# Altium PCB Oxy_PCB.PcbDoc
Units mil, origin at the board's own origin, x right, y up, seen from the top; angles counter-clockwise.
Board outline 2060 x 1575 mil, 2 copper layers (Top Layer, Bottom Layer); 84 components, 71 nets, 338 pads, 82 vias.
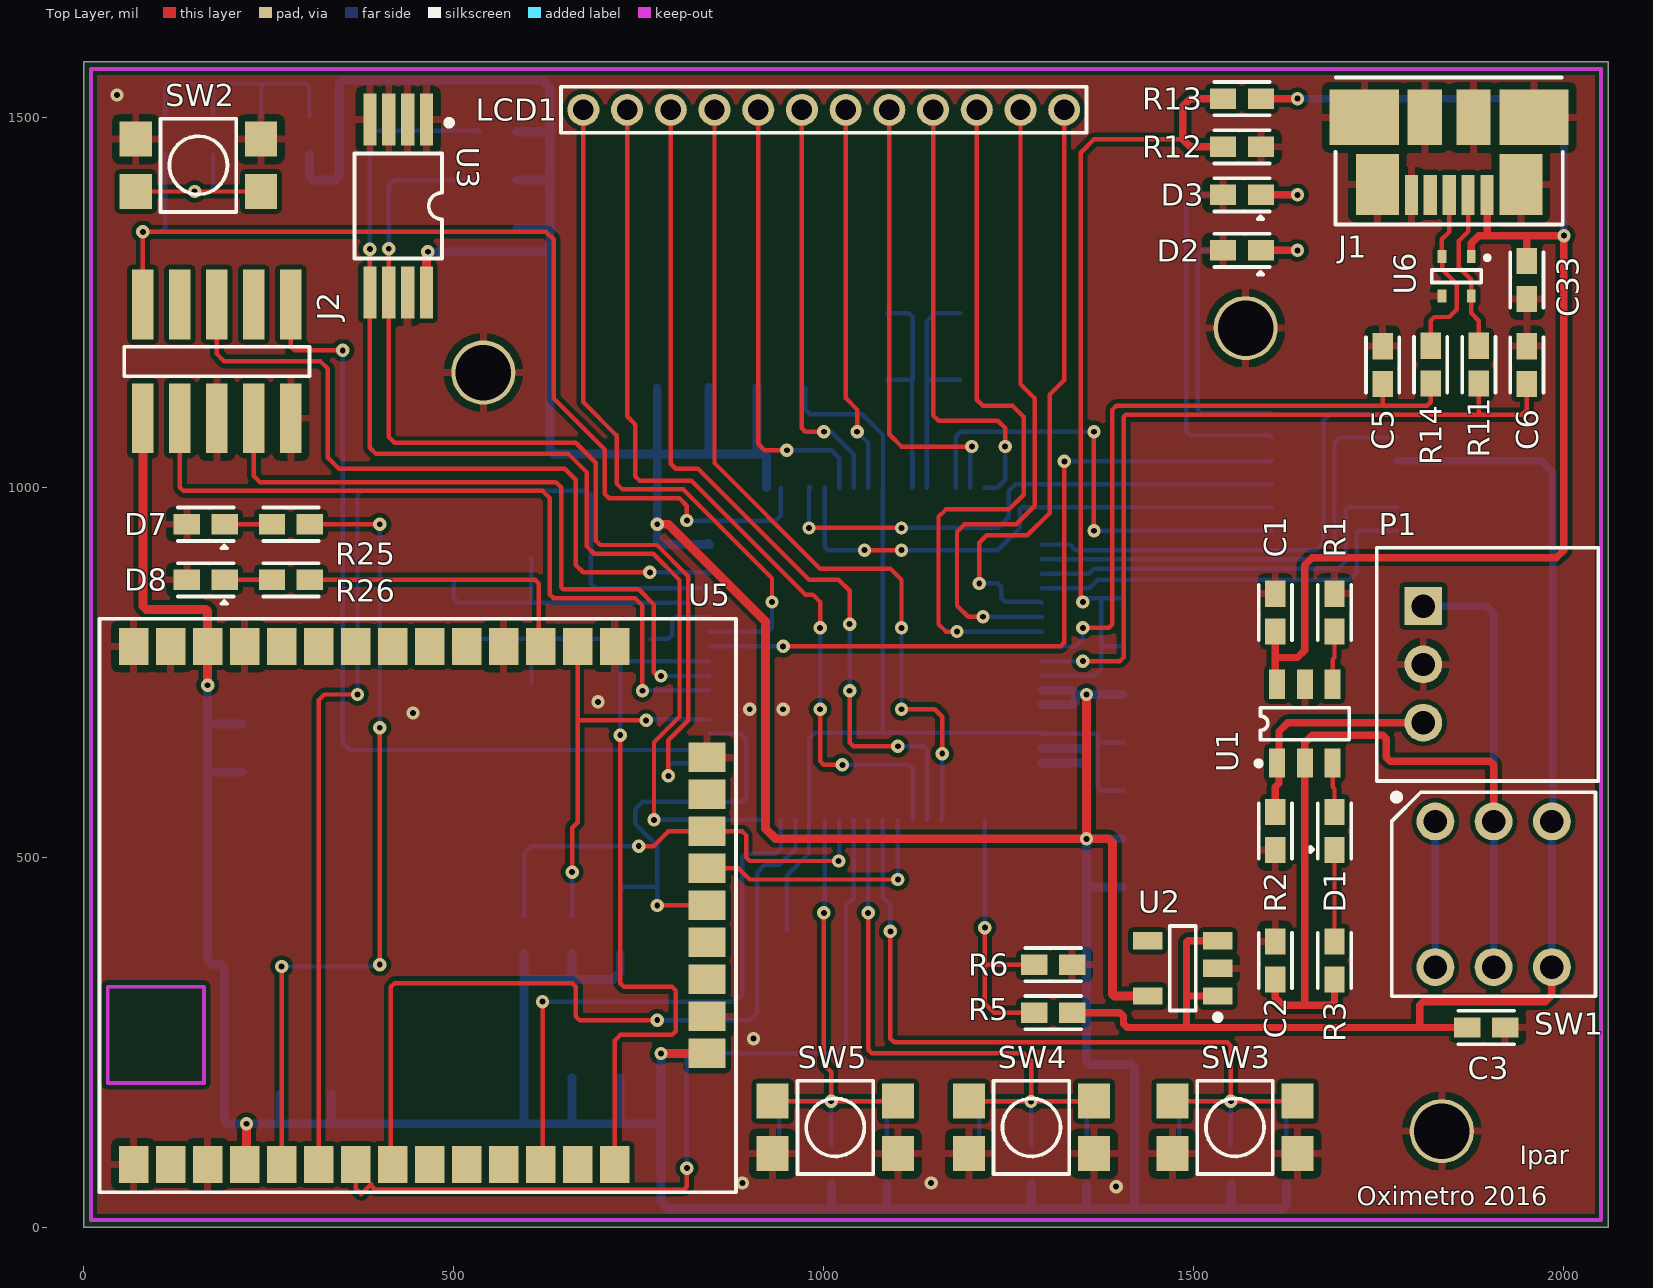
[diagram p0: Top Layer view]
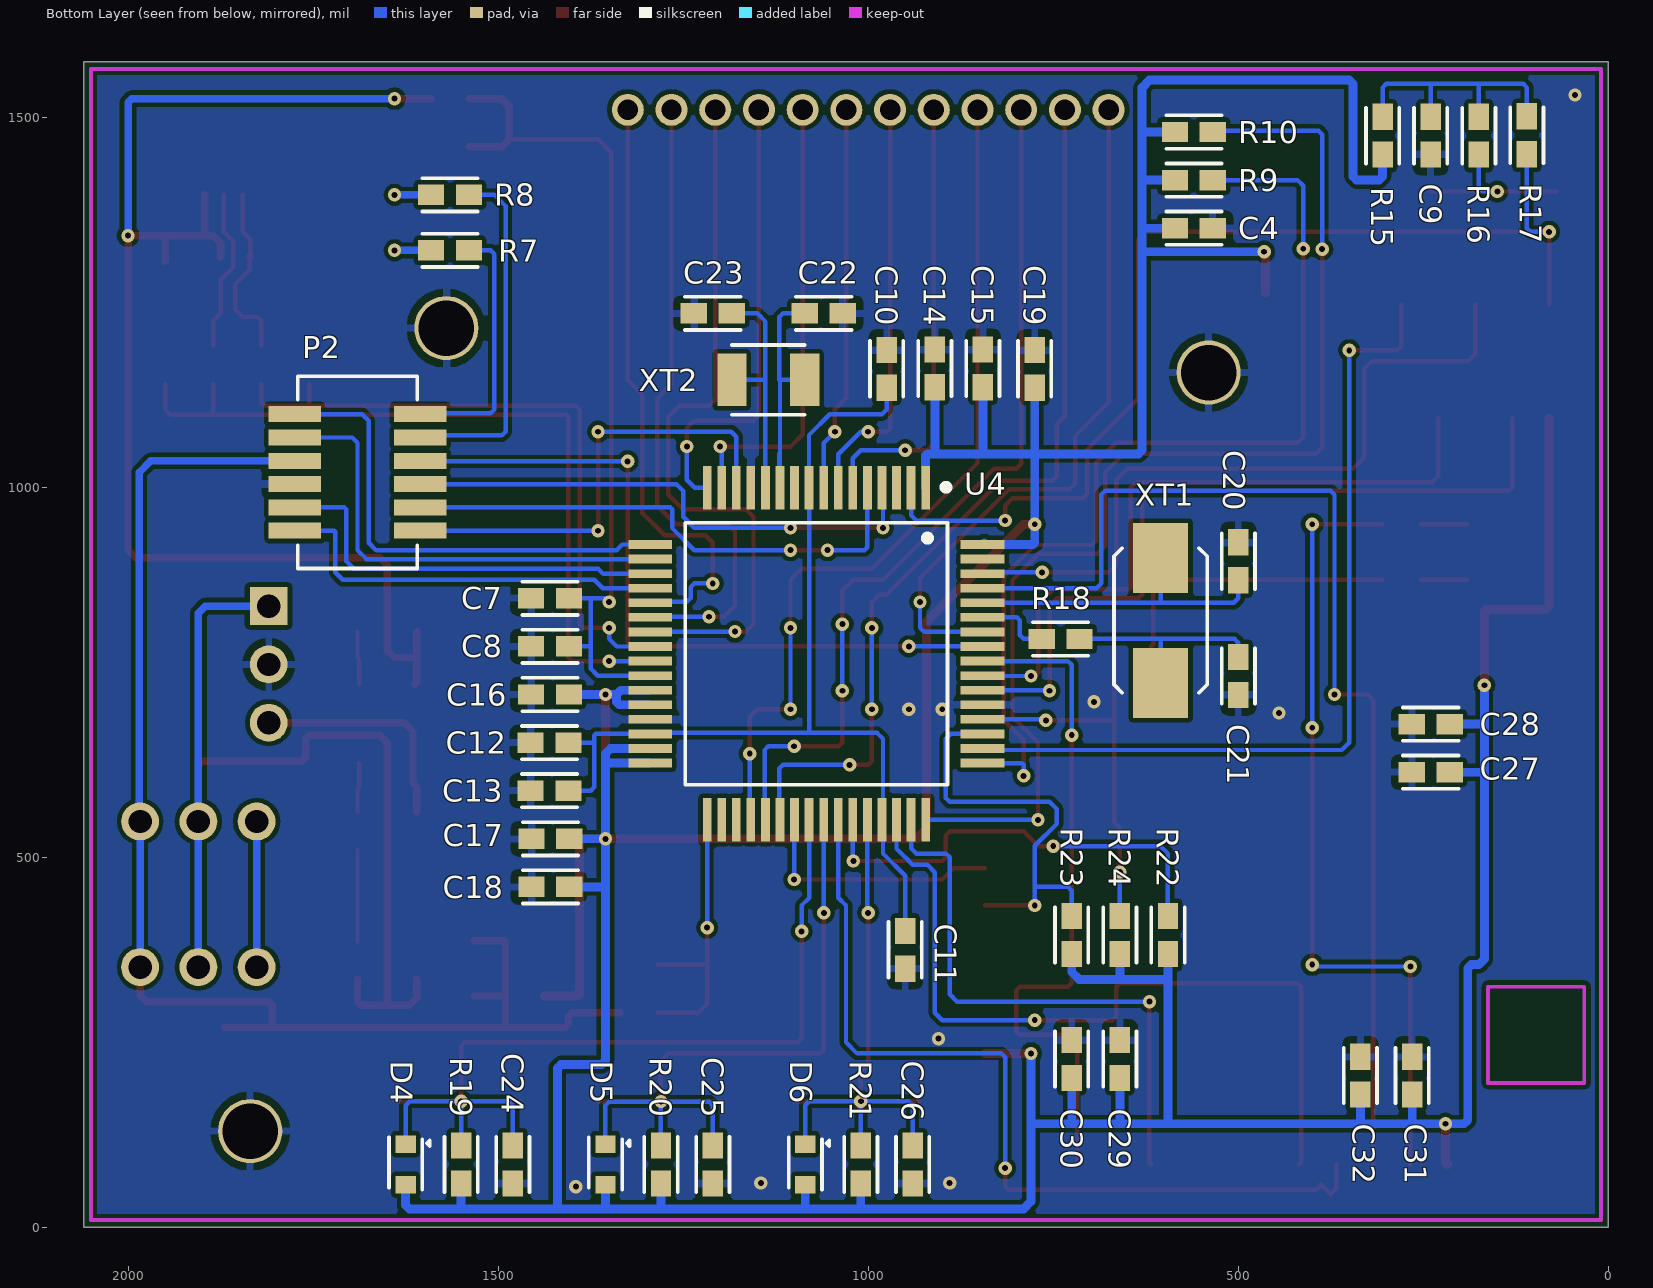
[diagram p1: Bottom Layer view, seen from below]
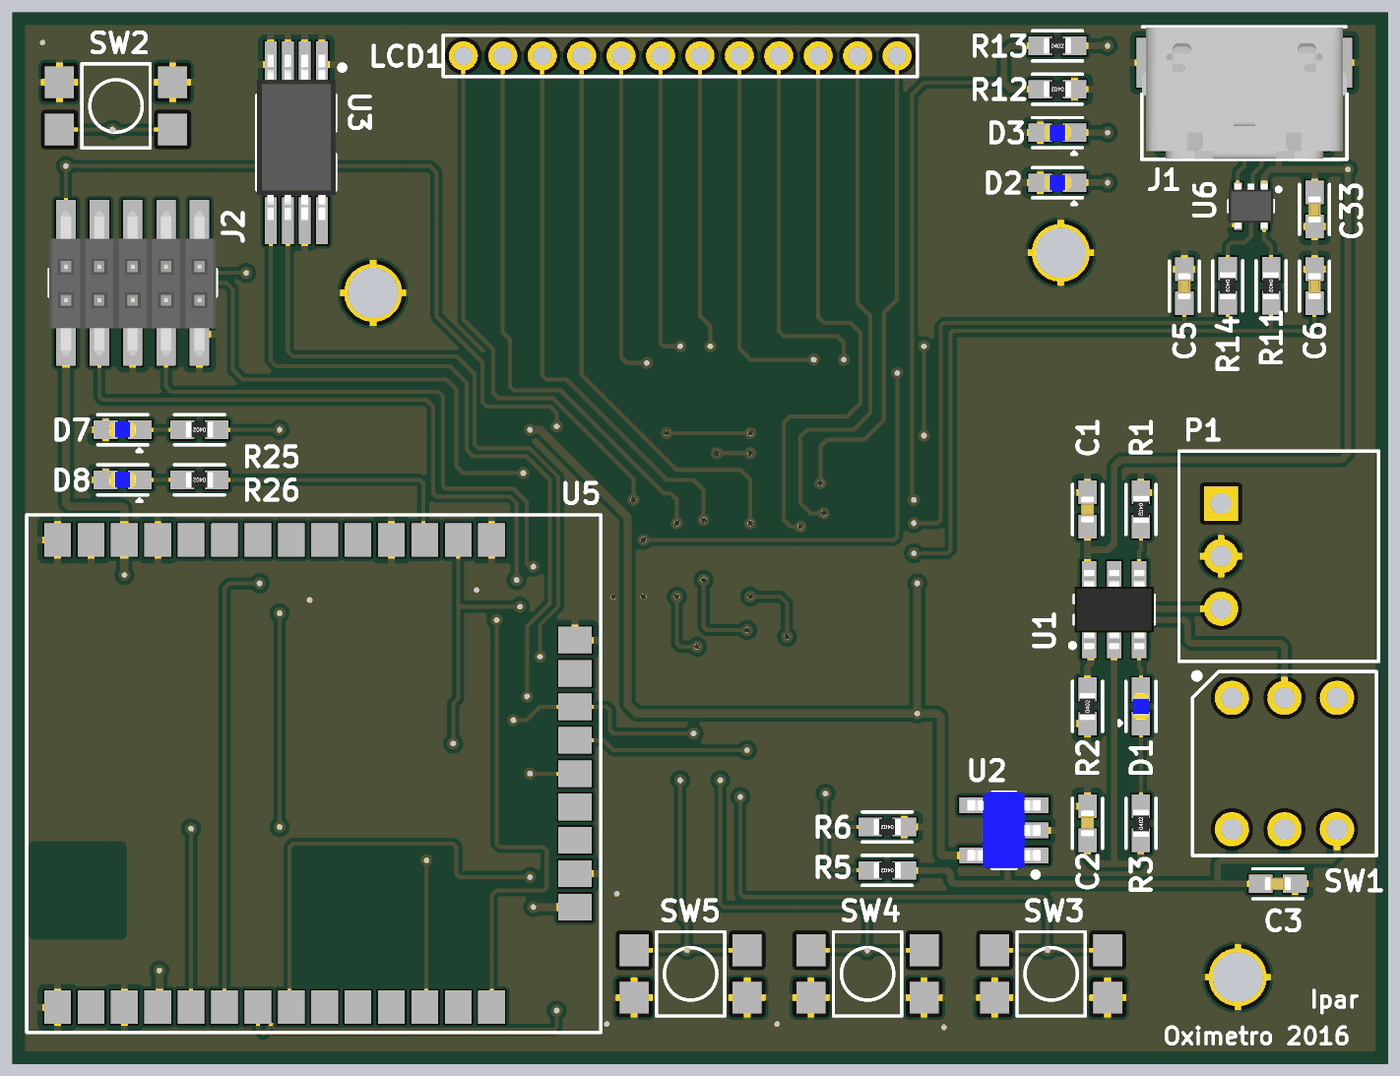
[diagram p2: 3D render of the assembled board from above, using the file's embedded part models]
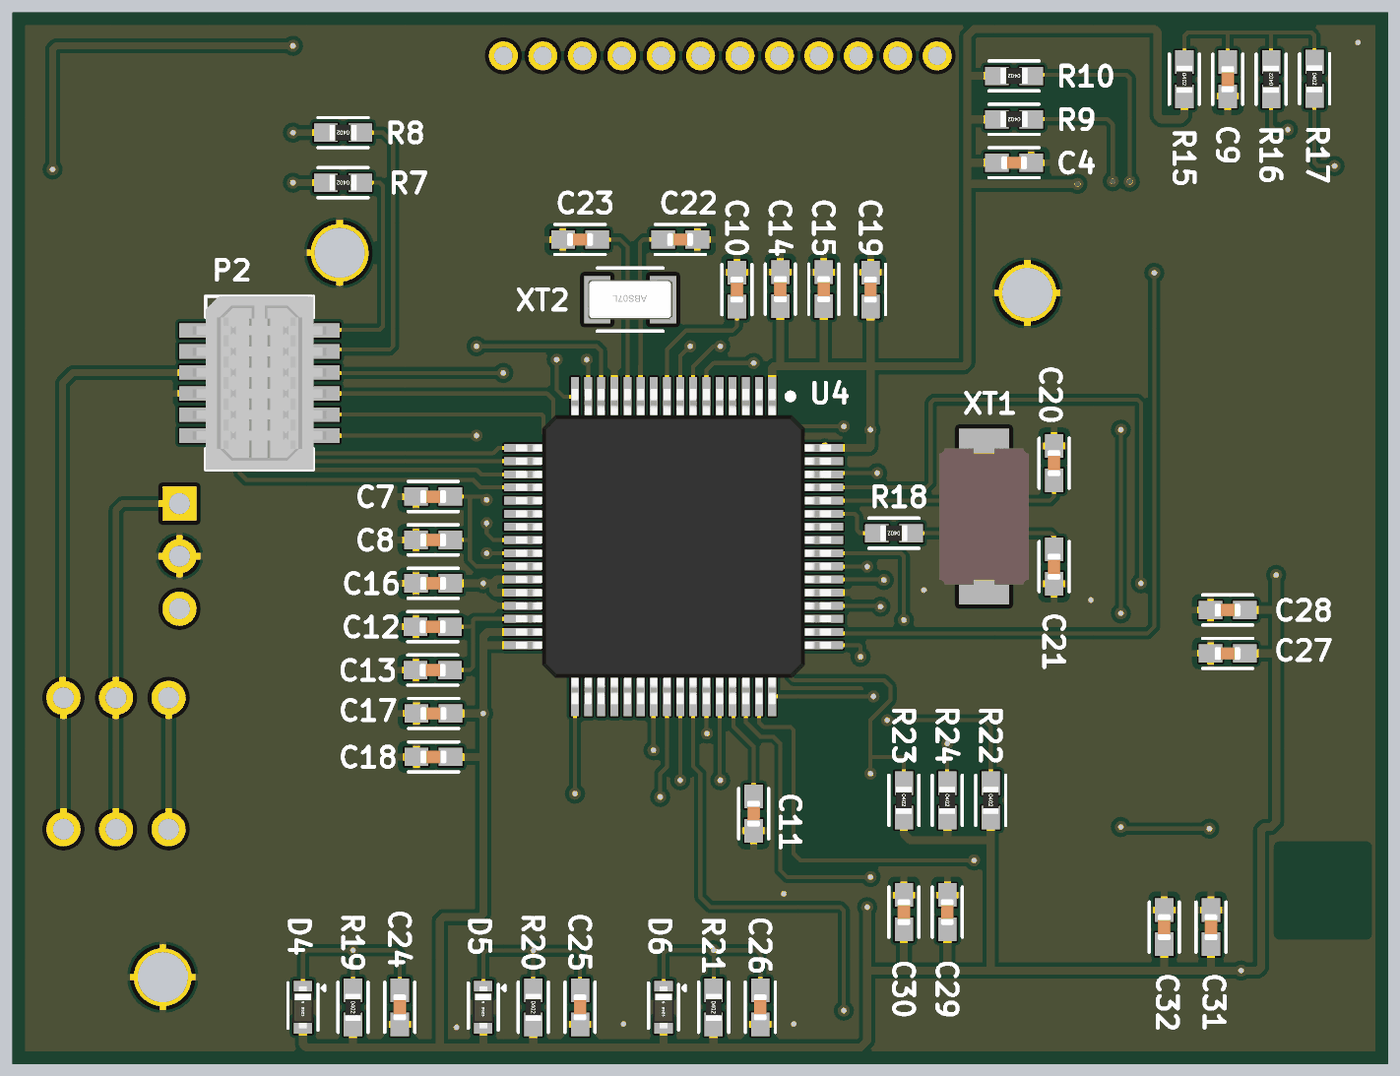
[diagram p3: 3D render of the assembled board from below, using the file's embedded part models]

## Layer stack, top to bottom
Top Solder: solder mask 0.4, Solder Resist, Dk 3.5
Top Layer: signal copper 1.4
Dielectric 1: dielectric 12.6, FR-4, Dk 4.8
Bottom Layer: signal copper 1.4
Bottom Solder: solder mask 0.4, Solder Resist, Dk 3.5

## Board outline
0,0 0,1575 2060,1575 2060,0

## Design rules (kind name [scope] priority, off if disabled: settings)
Clearance [All] p1: gap=6
ComponentClearance ComponentClearance_LCD [InComponent('LCD1')] p1: gap=0 collisioncheckmode=3 verticalgap=0 showdistances=FALSE
ComponentClearance [All] p2: gap=10 collisioncheckmode=3 verticalgap=10 showdistances=FALSE
MinimumSolderMaskSliver [All] p1: minsoldermaskwidth=2
PolygonConnect PolygonConnect_VIA [IsVia] p1: connectstyle=Direct reliefconductorwidth=10 reliefentries=4 polygonreliefangle="90 Angle" airgapwidth=10
PolygonConnect [All] p2: connectstyle=Relief reliefconductorwidth=10 reliefentries=4 polygonreliefangle="90 Angle" airgapwidth=10
RoutingVias [All] p1: holewidth=8 width=18 viastyle="Through Hole" minholewidth=8 minwidth=18 maxholewidth=8 maxwidth=18
SilkToSilkClearance [All] p1: silktosilkclearance=5
SilkToSolderMaskClearance [IsPad] p1: minsilkscreentomaskgap=3 clearancetoexposedcopper=TRUE
SolderMaskExpansion [All] p1: expansion=6
Width [All] p1: maxlimit=2000 minlimit=6 preferedwidth=6
26 further rules are at their usual default settings.

## Classes and differential pairs
component class "Wifi Module": C27 C28 C29 C30 C31 C32 D7 D8 R22 R23 R24 R25 R26 U5
component class USB: C5 C6 C33 J1 R11 R12 R13 R14 U6
component class uC_Alimentacion: C7 C8 C9 C10 C11 C12 C13 C14 C15 C16 C17 C18 C19 R15 R16 R17 SW2
component class SAMG55J: C20 C21 C22 C23 C24 C25 C26 D4 D5 D6 J2 R18 R19 R20 R21 SW3 SW4 SW5 U4 XT1 XT2
component class PCB2: D2 D3 P2 R7 R8
component class "Memoria I2C": C4 R9 R10 U3
component class Fuente: C1 C2 C3 D1 P1 R1 R2 R3 R5 R6 SW1 U1 U2
component class "Display 7Seg": LCD1

## Components (designator, comment, footprint, x,y, rotation, side; value= is the part's Value field where it differs from the comment)
C1 "1uF 10V X7R" C_0402 1610,830.59 r90 top
C2 "1uF 10V X7R" C_0402 1610,360.59 r90 top
C3 "1uF 10V X7R" C_0402 1895,270 r0 top
C4 "100nF 16V Y5V" C_0402 560,1350 r180 bottom
C5 "18pF 16V C0G" C_0402 1755,1165 r90 top
C6 "18pF 16V C0G" C_0402 1950,1165 r90 top
C7 "4.7uF 10V X5R" C_0402 1430,850 r0 bottom
C8 "100nF 16V Y5V" C_0402 1430,785 r0 bottom
C9 "100nF 16V Y5V" C_0402 240,1475 r270 bottom
C10 "100nF 16V Y5V" C_0402 975,1160 r90 bottom
C11 "100nF 16V Y5V" C_0402 950,375 r270 bottom
C12 "4.7uF 10V X5R" C_0402 1430.59,655 r0 bottom
C13 "100nF 16V Y5V" C_0402 1430.59,590 r0 bottom
C14 "4.7uF 10V X5R" C_0402 910,1160.59 r90 bottom
C15 "100nF 16V Y5V" C_0402 845,1160.59 r90 bottom
C16 "100nF 16V Y5V" C_0402 1430,720 r0 bottom
C17 "100nF 16V Y5V" C_0402 1429.41,525 r0 bottom
C18 "100nF 16V Y5V" C_0402 1429.41,460 r0 bottom
C19 "100nF 16V Y5V" C_0402 775,1160 r90 bottom
C20 "18pF 16V C0G" C_0402 500,900 r90 bottom
C21 "18pF 16V C0G" C_0402 500,745 r270 bottom
C22 "6.8pF 50V C0G" C_0402 1060,1235 r180 bottom
C23 "6.8pF 50V C0G" C_0402 1210,1235 r0 bottom
C24 "100nF 16V Y5V" C_0402 1480,85 r270 bottom
C25 "100nF 16V Y5V" C_0402 1210,85 r270 bottom
C26 "100nF 16V Y5V" C_0402 940,85 r270 bottom
C27 "2.2uF 10V X7S" C_0402 240,615 r0 bottom
C28 "100nF 16V Y5V" C_0402 240,680 r0 bottom
C29 "2.2uF 10V X7S" C_0402 660,227.5 r90 bottom
C30 "100nF 16V Y5V" C_0402 725,227.5 r90 bottom
C31 "2.2uF 10V X7S" C_0402 265,205 r90 bottom
C32 "100nF 16V Y5V" C_0402 335,205 r90 bottom
C33 "100nF 16V Y5V" C_0402 1950,1280 r270 top
D1 "VLMS1500-GS08" L_0402 1690,535.59 r90 top
D2 "VLMS1500-GS08" L_0402 1565,1320 r180 top
D3 "VLMS1500-GS08" L_0402 1565,1395 r180 top
D4 "1N4148" SOD523 1625,85 r270 bottom
D5 "1N4148" SOD523 1355,85 r270 bottom
D6 "1N4148" SOD523 1085,85 r270 bottom
D7 "VLMS1500-GS08" L_0402 165,950 r180 top
D8 "VLMS1500-GS08" L_0402 165,875 r180 top
J1 "Micro USB Fem" "MICRO USB" 1845,1395 r270 top
J2 "10-pin JTAG Connector" "JTAG HEADER" 180,1170 r0 top
LCD1 "LCD-S401M16KR" "7 SEG" 1000,1510 r0 top
P1 "JST 3-Pin" "BATT CONNECTOR" 1810,760.59 r270 top
P2 "Header-12" "HEADER 12" 1690,1020 r270 bottom
R1 "1K 5%" R_0402 1690,830.59 r270 top
R2 "250K 5%" R_0402 1610,535.59 r90 top
R3 "330R 5%" R_0402 1690,360.59 r90 top
R5 "1K 5%" R_0402 1310,290 r180 top
R6 "3.9K 5%" R_0402 1310,355 r180 top
R7 "220R 5%" R_0402 1565,1320 r0 bottom
R8 "220R 5%" R_0402 1565,1395 r0 bottom
R9 "3.3K 5%" R_0402 560,1415 r0 bottom
R10 "3.3K 5%" R_0402 560,1480 r0 bottom
R11 "33R 5%" R_0402 1885,1165.59 r270 top
R12 "47K 5%" R_0402 1565,1460 r180 top
R13 "27K 5%" R_0402 1565,1525 r0 top
R14 "33R 5%" R_0402 1820,1165.59 r270 top
R15 "100K 5%" R_0402 305,1475 r270 bottom
R16 "39R 5%" R_0402 175,1475 r90 bottom
R17 "39R 5%" R_0402 110,1475.59 r270 bottom
R18 "1K 5%" R_0402 740,795 r0 bottom
R19 "10K 5%" R_0402 1550,85 r270 bottom
R20 "10K 5%" R_0402 1280,85 r270 bottom
R21 "10K 5%" R_0402 1010,85 r270 bottom
R22 "100K 5%" R_0402 595,395 r270 bottom
R23 "100K 5%" R_0402 725,395 r270 bottom
R24 "100K 5%" R_0402 660,395 r270 bottom
R25 "220R 5%" R_0402 280,950 r180 top
R26 "220R 5%" R_0402 280,875 r180 top
SW1 "TL2230EEF100" TL2230 1905,450 r0 top
SW2 "KMR631NG" "TACT SWITCH" 155,1435 r0 top
SW3 "KMR631NG" "TACT SWITCH" 1555.59,135 r180 top
SW4 "KMR631NG" "TACT SWITCH" 1280.59,135 r180 top
SW5 "KMR631NG" "TACT SWITCH" 1015.59,135 r180 top
U1 "BQ21040" "SOT-23 (6)" 1650,680.59 r90 top
U2 "BU33SD5WG-TR" SSOP5 1485,350 r90 top
U3 "M24C02-WDW6TP" TSSOP-8 425,1380 r180 top
U4 "SAMG55J19" "LQFP 64" 1070,775 r270 bottom
U5 "RN1810" RN1810 455,435 r90 top
U6 "TPD2E001DRLR" TPD2E001 1855,1285 r180 top
XT1 "Crystal 8.0MHz" CRYSTAL_8 605,820 r270 bottom
XT2 "Crystal 32MHz" FC-135 1135,1145 r0 bottom

## Footprints (in the part's own frame and the unit in brackets; to place one, negate y for a bottom-side part, rotate by r counter-clockwise, add the part's x,y. Pads: shape width x height; smd on the part's side, far side on the other; paste and mask are expansions set on the pad)
"7 SEG" [mm]
  round 1.1 hole 0.7: 1(-8.25,0) 2(-6.75,0) 3(-5.25,0) 4(-3.75,0) 5(-2.25,0) 6(-0.75,0) 7(0.75,0) 8(2.25,0) 9(3.75,0) 10(5.25,0) 11(6.75,0) 12(8.25,0)
  silkscreen extent -9.02,-0.79 9.02,0.79
"BATT CONNECTOR" [mm]
  rect 1.3x1.3 hole 0.8: 1(-2,0)
  round 1.3 hole 0.8: 2(0,0) 3(2,0)
  silkscreen extent -4,-1.6 4,6
C_0402 [mm] "Ceramic Capacitor SMD 0402"
  rect 0.9x0.7 smd mask+0.07: 1(-0.65,0) 2(0.65,0)
  silkscreen extent -0.95,-0.57 0.95,0.57, body extent -0.5,-0.25 0.5,0.25, height 0.5
CRYSTAL_8 [mm]
  rect 2.4x1.9 smd: 1(-2.15,0) 2(2.15,0)
  silkscreen extent -2.48,-1.6 2.48,1.6, body extent -2.6,-1.7 2.6,1.7, height 1.3
FC-135 [mm]
  rect 1x1.8 smd: 1(-1.25,0) 2(1.25,0)
  silkscreen extent -1.25,-1.2 1.25,1.2, body extent -1.6,-0.75 1.6,0.75, height 0.38
"HEADER 12" [mm]
  rect 0.55x1.8 smd mask+0.07: 1(-2,-2.15) 2(-1.2,-2.15) 3(-0.4,-2.15) 4(0.4,-2.15) 5(1.2,-2.15) 6(2,-2.15) 7(2,2.15) 8(1.2,2.15) 9(0.4,2.15) 10(-0.4,2.15) 11(-1.2,2.15) 12(-2,2.15)
  silkscreen extent -3.3,-2.05 3.3,2.05, body extent -3.3,-2.55 3.3,2.55, height 3.7
"JTAG HEADER" [mm]
  rect 0.74x2.4 smd mask+0.07: 1(-2.54,-1.95) 2(-1.27,-1.95) 3(0,-1.95) 4(1.27,-1.95) 5(2.54,-1.95) 6(2.54,1.95) 7(1.27,1.95) 8(0,1.95) 9(-1.27,1.95) 10(-2.54,1.95)
  silkscreen extent -3.17,-0.51 3.17,0.51, body extent -3.17,-2.78 3.18,2.72, height 4.7
L_0402 [mm]
  rect 0.9x0.7 smd mask+0.07: 1(-0.65,0) 2(0.65,0)
  silkscreen extent -0.95,-0.57 0.95,0.83, body extent -0.5,-0.3 0.5,0.3, height 0.2
"LQFP 64" [mm]
  rect 1.5x0.3 smd mask+0.07: 1(-5.7,3.75) 2(-5.7,3.25) 3(-5.7,2.75) 4(-5.7,2.25) 5(-5.7,1.75) 6(-5.7,1.25) 7(-5.7,0.75) 8(-5.7,0.25) 9(-5.7,-0.25) 10(-5.7,-0.75) 11(-5.7,-1.25) 12(-5.7,-1.75) 13(-5.7,-2.25) 14(-5.7,-2.75) 15(-5.7,-3.25) 16(-5.7,-3.75) 33(5.7,-3.75) 34(5.7,-3.25) 35(5.7,-2.75) 36(5.7,-2.25) 37(5.7,-1.75) 38(5.7,-1.25) 39(5.7,-0.75) 40(5.7,-0.25) 41(5.7,0.25) 42(5.7,0.75) 43(5.7,1.25) 44(5.7,1.75) 45(5.7,2.25) 46(5.7,2.75) 47(5.7,3.25) 48(5.7,3.75)
  rect 0.3x1.5 smd mask+0.07: 17(-3.75,-5.7) 18(-3.25,-5.7) 19(-2.75,-5.7) 20(-2.25,-5.7) 21(-1.75,-5.7) 22(-1.25,-5.7) 23(-0.75,-5.7) 24(-0.25,-5.7) 25(0.25,-5.7) 26(0.75,-5.7) 27(1.25,-5.7) 28(1.75,-5.7) 29(2.25,-5.7) 30(2.75,-5.7) 31(3.25,-5.7) 32(3.75,-5.7) 49(3.75,5.7) 50(3.25,5.7) 51(2.75,5.7) 52(2.25,5.7) 53(1.75,5.7) 54(1.25,5.7) 55(0.75,5.7) 56(0.25,5.7) 57(-0.25,5.7) 58(-0.75,5.7) 59(-1.25,5.7) 60(-1.75,5.7) 61(-2.25,5.7) 62(-2.75,5.7) 63(-3.25,5.7) 64(-3.75,5.7)
  silkscreen extent -5.81,-4.5 4.5,4.54, body extent -6,-6 6,6, height 1.6
"MICRO USB" [mm]
  rect 1.38x0.45 smd mask+0.07: 1(0,1.3) 2(0,0.65) 3(0,0) 4(0,-0.65) 5(0,-1.3)
  rect 1.9x2.375 smd mask+0.07: 6(-2.66,2.913) 6(-2.66,-2.913)
  rect 1.9x1.175 smd mask+0.07: 6(-2.66,-0.837) 6(-2.66,0.837)
  rect 2.1x1.475 smd mask+0.07: 6(-0.356,-2.462) 6(-0.356,2.462)
  silkscreen extent -4.03,-3.91 1.02,3.9, body extent -4,-3.9 1,3.9, height 2.66
R_0402 [mm] "Resistor SMD 0402"
  rect 0.9x0.7 smd mask+0.07: 1(-0.65,0) 2(0.65,0)
  silkscreen extent -0.95,-0.57 0.95,0.57, body extent -0.52,-0.3 0.52,0.3, height 0.34
RN1810 [mil]
  rect 50x40 smd mask+2.76: 1(-350,387.5) 2(-350,337.5) 3(-350,287.5) 4(-350,237.5) 5(-350,187.5) 6(-350,137.5) 7(-350,87.5) 8(-350,37.5) 9(-350,-12.5) 10(-350,-62.5) 11(-350,-112.5) 12(-350,-162.5) 13(-350,-212.5) 14(-350,-262.5) 24(350,-262.5) 25(350,-212.5) 26(350,-162.5) 27(350,-112.5) 28(350,-62.5) 29(350,-12.5) 30(350,37.5) 31(350,87.5) 32(350,137.5) 33(350,187.5) 34(350,237.5) 35(350,287.5) 36(350,337.5) 37(350,387.5)
  rect 40x50 smd mask+2.76: 15(-200,-387.5) 16(-150,-387.5) 17(-100,-387.5) 18(-50,-387.5) 19(0,-387.5) 20(50,-387.5) 21(100,-387.5) 22(150,-387.5) 23(200,-387.5)
  Keep-Out Layer lines w5: -112.5,292.5 -240,292.5 -240,422.5 -110,422.5 -110,292.5
  silkscreen extent -388,-426 388,434
SOD523 [mm]
  rect 0.6x0.7 smd mask+0.07: 1(-0.7,0) 2(0.7,0)
  silkscreen extent -0.93,-0.57 0.86,0.83, body extent -0.8,-0.4 0.8,0.4, height 0.7
"SOT-23 (6)" [mm]
  rect 1x0.55 smd mask+0.07: 1(-1.35,0.95) 2(-1.35,0) 3(-1.35,-0.95) 4(1.35,-0.95) 5(1.35,0) 6(1.35,0.95)
  silkscreen extent -1.41,-1.53 0.55,1.63, body extent -1.5,-1.5 1.5,1.5, height 1.5
SSOP5 [mm]
  rect 0.6x1 smd mask+0.08: 1(-0.95,-1.2) 2(0,-1.2) 3(0.95,-1.2) 4(0.95,1.2) 5(-0.95,1.2)
  silkscreen extent -1.75,-1.27 1.45,0.45, body extent -1.45,-1.4 1.45,1.4, height 1.12
"TACT SWITCH" [mm]
  rect 1.1x1.2 smd: 1(-2.15,0.9) 1(2.15,0.9) 2(-2.15,-0.9) 2(2.15,-0.9)
  silkscreen extent -1.3,-1.6 1.3,1.6
TL2230 [mm]
  round 1.3 hole 0.8: 1(-2,2.5) 2(0,2.5) 3(2,2.5) 4(-2,-2.5) 5(0,-2.5) 6(2,-2.5)
  silkscreen extent -3.5,-3.5 3.5,3.5
TPD2E001 [mm]
  rect 0.3x0.45 smd mask+0.07: 1(-0.5,-0.675) 3(0.5,-0.675) 4(0.5,0.675) 5(-0.5,0.675)
  silkscreen extent -1.07,-0.66 0.85,0.22, body extent -0.85,-0.85 0.85,0.85, height 0.55
TSSOP-8 [mm]
  rect 0.45x1.78 smd mask+0.07: 1(-0.975,-2.97) 2(-0.325,-2.97) 3(0.325,-2.97) 4(0.975,-2.97) 5(0.975,2.97) 6(0.325,2.97) 7(-0.325,2.97) 8(-0.975,2.97)
  silkscreen extent -1.82,-2.93 1.5,1.8, body extent -1.5,-3.34 1.5,2.94, height 1.09

## Part data
C1 C2 C3 C4 C5 C6 C7 C8 C9 C10 C11 C12 C13 C14 C15 C16 C17 C18 C19 C20 C21 C22 C23 C24 C25 C26 C27 C28 C29 C30 C31 C32 C33: library part "Ceramic Capacitor", "Ceramic Capacitor SMD 0402"
D1 D2 D3 D7 D8: library part "Diode LED", "LED Diode SMD 0402"
D4 D5 D6: library part "Diode 1N4148", "Diode 1N4148 SMD SOD523"
J1: library part "Micro USB Connector", "Micro-USB 2.0 AB Receptacle, Right Angle, Part Number 47590-0001"
J2: library part "JTAG Connector", "JTAG Connector Micro Terminal Strip .050\" 10pin 2row"
LCD1: library part "LCD Display 7-Seg", "Lumex LCD Numeric Display 7-Seg 4 Digit S401M16KR"
P1: library part "3-Pin Header", "JST Right Angle Connector THD 3-Pin PN: PRT-09750"
P2: library part "12-Pin Header", "Board to Board & Mezzanine Connector 0.8 BtB Molex PN: 53307-1271"
R1 R2 R3 R5 R6 R7 R8 R9 R10 R11 R12 R13 R14 R15 R16 R17 R18 R19 R20 R21 R22 R23 R24 R25 R26: library part Resistor, "Resistor SMD 0402"
SW1: library part "PushButton Switch", "PushButton Switch Latching THD TL2230EEF100"
SW2 SW3 SW4 SW5: library part "Tact Switch", "Tact Switch"
U1: library part "BQ21040 Charger", "BQ21040 0.8A Sigle Cell Li-Ion Battery Charger SOT-23"
U2: library part "LDO CMOS Regulator", "LDO Voltage Regulator 1ch 500mA CMOS SSOP5"
U3: library part "EEPROM M24C02-WDW6TP", "M24C02-WDW6TP 2.5-5V 2Kbit Serial I2C Bus EEPROM"
U4: "Atmel SMART SAM G55 Cortex M4 32-bit 64-lead LQFP"
U5: library part "RN1810 Wifi Module", "2.4 GHz IEEE 802.11b/g/n Wireless Module RN1810"
U6: library part "Diode ESD-Protection", "Low-Capacitance 2-Ch ESD-Protection for High-Speed Data Interfaces, SOT5"
XT1: library part "Crystal 8MHz", "Crystal Oscillator 8.0MHz 20ppm 18pF PN: ABM7-8.000MHZ-D2Y-T"
XT2: "Crystal Oscillator 32.768KHz 20ppm 7.0 pF PN: FC-135 32.7680KA-AG0"

## Free pads (board coordinates)
  round 86.61 hole 75: 2(540,1155) 3(1570,1215) 4(1835,130)
  round 39.37 smd: ""(-98.43,98.43) ""(-98.43,4626.57) ""(4218.43,98.43)
  round 118.11 hole 118.11: ""(216.54,-127.95) ""(3903.46,-127.95)

## Via types
v1: diameter 18, hole 8, Top Layer to Bottom Layer, tented both sides, 82 vias

## Nets (pads, with @x,y where several pads share a name; then routed paths per layer and width w, separated by ;. In a path a pad name is that pad's centre, name@x,y a point inside that pad or via, vN(x,y) a via of type N, cw(c..) or ccw(c..) an arc to the next point about the centre after c; other vN are vias at no path point)
1D-F: LCD1.5 U4.6 | length 608.6
  Top Layer w6: LCD1.5 911.42,1058.58 920,1050 v1(950,1050)
  Bottom Layer w6: v1(950,1050) 1010,1050 1020.79,1039.21 U4.6
2D-F: LCD1.7 U4.8 | length 523.3
  Top Layer w6: LCD1.7 1029.53,1120.47 1045,1105 v1(1045,1075)
  Bottom Layer w6: v1(1045,1075) 1060.16,1059.84 U4.8
3D-F: LCD1.9 U4.16 | length 618.9
  Top Layer w6: LCD1.9 1147.64,1097.36 1155,1090 1235,1090 1245,1080 v1(1245,1055)
  Bottom Layer w6: U4.16 1234.41,999.41 1245,1010 v1(1245,1055)
3V3: C4.1 C14.1 C15.1 C16.1 C17.1 C18.1 C19.1 C27.1 C28.1 C29.1 C30.1 C31.1 C32.1 D4.2 D5.2 D6.2 J2.1 R9.2 R10.2 R15.2 R19.2 R20.2 R21.2 R22.2 R23.2 R24.2 U2.5 U3.8 U4.1 U4.27 U4.28 U4.31 U4.32 U4.64 U5.4 U5.15 U5.35 | length 8319.7
  Top Layer w12: J2.1 80,840 85,835 165,835 167.5,832.5 U5.35 v1(167.5,732.5) ; U5.4 220,87.5 v1(220,140) ; U3.8 463.39,1316.61 v1(465,1318.23) ; v1(775,950) 790,950 921,819 921,538.89 934.89,525 v1(1355,525) ; v1(780,235) U5.15 ; v1@1353,718 1355,716 v1(1355,525) ; U2.5 1392.4,312.6 1390,315 1390,520 1385,525 v1(1355,525)
  Bottom Layer w12: 167.5,615 C27.1 ; 167.5,680 C28.1 ; v1(167.5,732.5) 167.5,362.5 175,355 185,355 190,350 190,145 195,140 v1(220,140) 265,140 ; C31.1 265,140 ; R15.2 305,1420 310,1415 340,1415 345,1420 345,1545 350,1550 620,1550 630,1540 630,1480 ; C32.1 335,140 ; v1(465,1318.23) 626.77,1318.23 ; C4.1 630,1350 ; R9.2 630,1415 ; R10.2 630,1480 ; 595,140 595,335 ; R22.2 595,335 ; C29.1 660,140 ; R24.2 660,335 ; C30.1 725,140 ; R23.2 725,345 715,335 660,335 ; C19.1 775,1045 ; 780,140 725,140 ; v1(780,235) 780,35 790,25 1010,25 ; U4.64@843.23,925 U4.64 777.36,922.64 775,925 v1(775,950) 775,1045 ; 845,1047.5 C15.1 ; C14.1 910,1045 ; U4.1 922.36,1042.64 920,1045 910,1045 ; R21.2 1010,25 ; D6.2 1085,25 ; R20.2 1280,25 ; U4.32 1350.64,627.36 ; U4.31 1347.95,647.05 1355,640 v1(1355,525) ; U4.28 1336.1,706.1 1340,710 1340,720 ; U4.27 1334.21,725.79 1340,720 ; D5.2 1355,25 ; C18.1 1355,460 ; C17.1 v1(1355,525) ; C16.1 v1(1355,720) 1340,720 ; R19.2 1550,25 ; D4.2 1625,30 1620,25 1550,25 ; 265,140 335,140 ; 335,140 660,140 ; 595,335 660,335 ; 630,1350 630,1415 ; 630,1350 630,1050 635,1045 775,1045 ; 630,1415 630,1480 ; 660,140 725,140 ; 775,1045 910,1045 ; 1010,25 1085,25 ; 1085,25 1280,25 ; 1280,25 1355,25 ; 1355,25 1420,25 ; 1355,460 v1(1355,525) ; 1355,460 1355,225 1360,220 1415,220 1420,215 1420,25 ; 1420,25 1550,25
3V7: C3.1 P2.3 R5.1 SW1.3 SW1.6 U2.1 U2.3 | length 1882.4
  Top Layer w10: R5.1 1400,290 1405,285 1405,275 1410,270 1490,270 ; 1492.4,312.6 U2.1 ; U2.3 1492.4,387.4 1490,385 1490,270 ; C3.1 1805,270 ; SW1.6 1983.74,313.74 1975,305 1810,305 1805,300 1805,270 ; 1490,270 1805,270
  Bottom Layer w10: P2.3 1969.25,1035.75 1985,1020 SW1.3@1985,549.68 ; SW1.6 SW1.3
4D-F: LCD1.11 U4.22 | length 883.4
  Top Layer w6: v1(1215,825) 1195,825 1180,840 1180,940 1190,950 1260,950 1285,975 1285,1120 1265.75,1139.25 LCD1.11
  Bottom Layer w6: v1(1215,825) 1293.62,825 U4.22
5V: C1.1 C33.1 J1.1 R13.2 U1.6 U6.1 | length 1839.6
  Top Layer w10: R13.2 v1(1640,1525) ; C1.1 1610,736.34 U1.6 ; 1612.6,770 1640,770 1650,780 1650,895 1660,905 1990,905 2000,915 v1(2000,1340) 1950,1340 ; U6.1 1874.68,1329.68 1885,1340 1950,1340 ; 1896.18,1341.18 J1.1 ; C33.1 1950,1340
  Bottom Layer w10: v1(1640,1525) 1995,1525 2000,1520 v1(2000,1340)
ADC_BATT: R5.2 R6.2 U4.33 | length 386.9
  Top Layer w6: v1(1217.64,405) 1217.64,355 ; R5.2 1230,290 1217.64,302.36 1217.64,355 ; R6.2 1217.64,355
  Bottom Layer w6: v1(1217.64,405) U4.33
CMD_STATUS: R25.1 U5.5 | length 1090.4
  Top Layer w6: U5.5 v1(267.5,352.5) ; R25.1 v1(400,950) ; v1(400,355) v1(400,675)
  Bottom Layer w6: v1(267.5,352.5) 397.5,352.5 v1(400,355) ; v1(400,675) v1(400,950)
COL_4C-A: LCD1.12 U4.21 | length 823.8
  Top Layer w6: v1(1210,870) 1210,925 1220,935 1275,935 1305,965 1305,1125 1324.8,1144.8 LCD1.12
  Bottom Layer w6: v1(1210,870) 1235,870 1240,865 1240,850 1245,845 1293.31,845 U4.21
COM0: LCD1.1 U4.58 | length 940.2
  Top Layer w6: LCD1.1 675.2,1114.8 720,1070 720,1005 728,997 809.97,997 930,876.97 v1(930,845)
  Bottom Layer w6: U4.58 924.53,804.53 930,810 v1(930,845)
COM1: LCD1.2 U4.38 | length 1233.7
  Top Layer w6: LCD1.2 734.25,1095.75 745,1085 745,1015 751,1009 821,1009 975,855 985,855 995,845 v1(995,810) ; v1(995,700) 995,630 1000,625 v1(1025,625)
  Bottom Layer w6: v1(995,700) v1(995,810) ; v1(1025,625) 1115,625 1120,620 1120,551.38 U4.38
COM2: LCD1.3 U4.37 | length 1200.1
  Top Layer w6: LCD1.3 793.31,1031.69 800,1025 830,1025 980,875 1020,875 1035,860 v1(1035,815) ; v1(1035,725) 1035,655 1040,650 v1(1100,650)
  Bottom Layer w6: v1(1035,725) v1(1035,815) ; v1(1100,650) 1135,650 1140,645 1140,551.69 U4.37
COM3: LCD1.4 U4.36 | length 1169.4
  Top Layer w6: LCD1.4 852.36,1032.64 995,890 1090,890 1105,875 v1(1105,810) ; v1(1105,700) 1150,700 1160,690 v1(1160,640)
  Bottom Layer w6: v1(1105,700) v1(1105,810) ; U4.36 1160,552.01 v1(1160,640)
D+: C5.1 R14.2 U4.24 | length 895.4
  Top Layer w6: v1(1350,810) 1385,810 1390,815 1390,1105 1395,1110 1755,1110 ; C5.1 1755,1110 ; R14.2 1820,1115 1815,1110 1755,1110
  Bottom Layer w6: U4.24 1339.84,784.84 1350,795 v1(1350,810)
D-: C6.1 R11.2 U4.25 | length 1063.3
  Top Layer w6: v1(1350,765) 1400,765 1405,770 1405,1095 1408,1098 1943,1098 1950,1105 C6.1 ; 1885,1098 R11.2
  Bottom Layer w6: U4.25 1294.57,765 v1(1350,765)
DP1_1C-A: LCD1.6 U4.7 | length 560.1
  Top Layer w6: LCD1.6 970.47,1079.53 975,1075 v1(1000,1075)
  Bottom Layer w6: v1(1000,1075) 1010,1075 1040.47,1044.53 U4.7
DP2_2C-A: LCD1.8 U4.15 | length 613.2
  Top Layer w6: LCD1.8 1088.58,1071.42 1105,1055 v1(1200,1055)
  Bottom Layer w6: U4.15 1197.95,1052.95 v1(1200,1055)
DP3_3C-A: LCD1.10 U4.23 | length 985.8
  Top Layer w6: v1(1180,805) 1165,805 1155,815 1155,960 1165,970 1250,970 1270,990 1270,1095 1255,1110 1215,1110 1206.69,1118.31 LCD1.10
  Bottom Layer w6: v1(1180,805) 1293.94,805 U4.23
EMM: C26.1 D6.1 R21.1 SW5.2 U4.44 | length 870.2
  Top Layer w6: SW5.2@930.94,170.43 v1(1010,170.43) ; v1(1000,425) 1000,220 1010,210 v1(1010,170.43) ; SW5.2@1100.24,170.43 v1(1010,170.43)
  Bottom Layer w6: C26.1 940,165 945.43,170.43 v1(1010,170.43) ; v1(1000,425) 1001.1,426.1 U4.44 ; R21.1 v1(1010,170.43) ; D6.1 1085,165 1079.57,170.43 v1(1010,170.43)
GND: C1.2 C2.2 C3.2 C4.2 C5.2 C6.2 C7.2 C8.2 C9.2 C10.2 C11.2 C12.2 C13.2 C14.2 C15.2 C16.2 C17.2 C18.2 C19.2 C20.2 C21.2 C22.2 C23.2 C24.2 C25.2 C26.2 C27.2 C28.2 C29.2 C30.2 C31.2 C32.2 C33.2 D2.2 D3.2 D7.2 D8.2 J1.5 J1.6 J2.3 J2.5 P1.2 P2.4 pad.2 pad.3 pad.4 R1.1 R2.1 R6.1 R12.1 SW2.1 SW3.1 SW4.1 SW5.1 U1.5 U2.2 U3.1 U3.2 U3.3 U3.4 U3.7 U4.13 U4.29 U4.53 U5.1 U5.3 U5.16 U5.23 U5.24 U5.27 U5.34 U5.36 U5.37 U6.4
  other v1: 1395,55 890,60 1145,60 905,255 445,695 900,700 945,700 695,710 45,1530
I2C_SCL: R9.1 U3.6 U4.49 | length 1361.4
  Top Layer w6: v1(412.2,1322.2) U3.6 412.2,1067.8 420,1060 665,1060 692,1033 692,928 698,922 774.51,922 817,879.51 817,685.03 790,658.03 v1(790,610)
  Bottom Layer w6: v1(412.2,1322.2) 412.2,1407.2 420,1415 R9.1 ; v1(790,610) 790,625 792.36,627.36 U4.49
I2C_SDA: R10.1 U3.5 U4.48 | length 1614.8
  Top Layer w6: v1(386.61,1321.61) U3.5 386.61,1053.39 395,1045 655,1045 680,1020 680,920 690,910 769.54,910 805,874.54 805,690 770.59,655.59 v1(770.59,550.59)
  Bottom Layer w6: v1(386.61,1321.61) 386.61,1476.61 391.61,1481.61 532.8,1481.61 R10.1 ; v1(770.59,550.59) U4.48
IP_STATUS: U4.46 U5.8 | length 1080.1
  Top Layer w6: U5.8 415,87.5 415,325 420,330 660,330 665,325 665,285 670,280 v1(775,280)
  Bottom Layer w6: v1(775,280) 900,280 910,290 910,480 920,490 940,490 961.73,511.73 U4.46
JTAG_TCK: J2.4 U4.55 | length 938.8
  Top Layer w6: J2.4 230,1015 238,1007 638,1007 645,1000 645,865 648,862 749.97,862 770,841.97 770,750 775,745 v1(780,745)
  Bottom Layer w6: v1(780,745) 845.12,745 U4.55
JTAG_TDI: J2.8 U4.62 | length 992.9
  Top Layer w6: J2.8 180,1180 190,1170 320,1170 330,1160 330,1040 345,1025 650,1025 665,1010 665,895 675,885 v1(765,885)
  Bottom Layer w6: v1(765,885) 843.86,885 U4.62
JTAG_TDO: J2.6 U4.50 | length 1159.4
  Top Layer w6: J2.6 280,1190 285,1185 v1(350,1185)
  Bottom Layer w6: v1(350,1185) 350,655 360,645 843.54,645 U4.50
JTAG_TMS: J2.2 U4.54 | length 1066.6
  Top Layer w6: J2.2 130,1000 135,995 620,995 630,985 630,855 635,850 745,850 755,840 v1(755,725)
  Bottom Layer w6: v1(755,725) 755.79,725.79 U4.54
LAST: C25.1 D5.1 R20.1 SW4.2 U4.41 | length 1076.1
  Top Layer w6: v1(1060,425) 1060,240 1065,235 1270,235 1280,225 v1@1280,170.43 ; SW4.2@1195.94,170.43 v1@1280,170.43 ; SW4.2@1365.24,170.43 v1@1280,170.43
  Bottom Layer w6: v1(1060,425) 1060,550.43 U4.41 ; C25.1 1210,165 1215,170 v1(1280,170) ; R20.1 v1(1280,170) ; D5.1 1355,165 1350,170 v1(1280,170)
LED_ALM: P2.12 R7.1 | length 349.4
  Bottom Layer w6: R7.1 1510,1320 1505,1315 1505,1105 1510,1100 1604.09,1100 P2.12
MEDIR: C24.1 D4.1 R19.1 SW3.2 U4.40 | length 1324
  Top Layer w6: v1(1090,400) 1090,255 1095,250 1545,250 1550,245 v1(1550,170.43) ; SW3.2@1470.94,170.43 v1(1550,170.43) ; SW3.2@1640.24,170.43 v1(1550,170.43)
  Bottom Layer w6: U4.40 1079.84,445.16 1090,435 v1(1090,400) ; C24.1 1480,165 1485.43,170.43 v1(1550,170.43) ; R19.1 v1(1550,170.43) ; D4.1 1625,165 1619.57,170.43 v1(1550,170.43)
MISC_STATUS: R26.1 U5.26 | length 397.5
  Top Layer w6: R26.1 610,875 615,870 615,787.5 U5.26
NetC2_1: C2.1 P1.1 R3.1 SW1.2 SW1.5 U1.2 | length 1440.4
  Top Layer w10: C2.1 1610,310 1620,300 1650,300 ; R3.1 1690,305 1685,300 1650,300 ; SW1.2 1905,625 1900,630 1765,630 1760,635 1760,660 1755,665 1660,665 1650,655 U1.2 1650,300
  Bottom Layer w10: P1.1 1895.67,839.33 1905,830 SW1.2 SW1.5
NetC9_1: C9.1 R15.1 R16.2 R17.1 | length 366.2
  Bottom Layer w6: R17.1 110,1540 115,1545 175,1545 ; R16.2 175,1545 ; C9.1 240,1545 ; R15.1 305,1540 300,1545 175,1545
NetC21_1: C21.1 R18.1 XT1.2 | length 290.8
  Bottom Layer w6: C21.1 500,790 505,795 R18.1 ; XT1.2 605,790.3
NetD1_1: D1.1 R3.2 | length 123.8
  Top Layer w6: R3.2 D1.1
NetD1_2: D1.2 U1.3 | length 67.3
  Top Layer w6: U1.3 1687.4,595.2 1690,592.6 D1.2
NetD2_1: D2.1 R7.2 | length 98.8
  Top Layer w10: D2.1 v1(1640,1320)
  Bottom Layer w10: R7.2 v1(1640,1320)
NetD3_1: D3.1 R8.2 | length 98.8
  Top Layer w10: D3.1 v1(1640,1395)
  Bottom Layer w10: R8.2 v1(1640,1395)
NetD7_1: D7.1 R25.2 | length 63.8
  Top Layer w6: D7.1 R25.2
NetD8_1: D8.1 R26.2 | length 63.8
  Top Layer w6: D8.1 R26.2
NetJ1_2: J1.2 R11.1 U6.5 | length 220.4
  Top Layer w6: J1.2 1870.59,1345.59 1857.78,1332.78 1857.78,1297.22 1874.68,1280.32 U6.5 1874.68,1235.32 1885,1225 R11.1
NetJ1_3: J1.3 R14.1 U6.3 | length 242.5
  Top Layer w6: R14.1 1820,1225 1825,1230 1845,1230 1855,1240 1855,1275 1835.31,1294.69 U6.3 ; U6.3@1835,1311.89 1835,1335 1845,1345 J1.3
  Top Layer w10: U6.3@1835,1311.89 U6.3
NetP1_3: P1.3 R2.2 U1.1 | length 310.8
  Top Layer w10: R2.2 1610,595 1615,600 1615,670 1626.85,681.85 P1.3
NetR1_2: R1.2 U1.4 | length 72.3
  Top Layer w6: U1.4 1687.4,767.4 1690,770 R1.2
NetR16_1: R16.1 SW2.2 | length 241.4
  Top Layer w6: SW2.2@70.35,1399.57 v1(150,1399.57) SW2.2@239.65,1399.57
  Bottom Layer w6: v1@150,1400 v1(150,1399.57) 169.57,1399.57 175,1405 R16.1
NetR23_1: R23.1 U4.51 U5.19 | length 584.8
  Top Layer w6: v1(775,435) U5.19
  Bottom Layer w6: R23.1 725,455 730,460 775,460 ; v1(775,435) 775,515.46 745,545.46 745,565 755,575 890,575 895,580 895,660 888.27,666.73 U4.51
NetR24_1: R24.1 U4.52 U5.25 | length 546.2
  Top Layer w6: v1(660,480) 660,540 667.5,547.5 667.5,685 ; U5.25 667.5,685 ; v1(760,685) 667.5,685
  Bottom Layer w6: R24.1 v1(660,480) ; v1(760,685) 761.42,686.42 U4.52
NetSW1_1: SW1.1 SW1.4 | length 196.9
  Bottom Layer w10: SW1.4 SW1.1
NetU4_39: U4.39 U5.20 | length 343.8
  Top Layer w6: U5.20 885,485 900,470 v1(1100,470)
  Bottom Layer w6: v1(1100,470) U4.39@1100,550.12
NetU4_56: U4.56 U5.14 | length 942
  Top Layer w6: U5.14 717.5,252.5 725,260 795,260 800,265 800,320 795,325 730,325 725,330 v1(725,665)
  Bottom Layer w6: v1(725,665) 725,760 730.16,765.16 U4.56
NRST: J2.10 R17.2 U4.2 | length 1467
  Top Layer w6: J2.10 v1(80,1345) 625,1345 635,1335 635,1120 704,1051 704,991 710,985 805,985 815,975 v1(815,955)
  Bottom Layer w6: v1(80,1345) 105,1345 110,1350 R17.2 ; v1(815,955) 935,955 942.05,962.05 U4.2 U4.2
PCB2_ADC_RDY: P2.6 U4.20 | length 544.6
  Bottom Layer w6: U4.20 1358.58,863.58 1370,875 1710,875 1720,885 1720,940 1721.26,941.26 P2.6
PCB2_AFE_PDNZ: P2.2 U4.18 | length 633.2
  Bottom Layer w6: U4.18 1677.95,902.95 1690,915 1690,1060 1697.24,1067.24 P2.2
PCB2_AFE_RST: P2.5 U4.19 | length 558.3
  Bottom Layer w6: U4.19 1358.27,883.27 1365,890 1695,890 1705,900 1705,970 1707.76,972.76 P2.5
PCB2_CS: P2.7 U4.14 | length 632.5
  Top Layer w6: v1(1365,941.26) v1(1365,1075)
  Bottom Layer w6: U4.14 1178.27,1068.27 1185,1075 v1(1365,1075) ; v1(1365,941.26) P2.7
PCB2_DIAG_END: P2.1 U4.17 | length 656.2
  Bottom Layer w6: U4.17 1332.32,922.64 1340,914.95 1664.95,914.95 1675,925 1675,1090 1683.74,1098.74 P2.1
PCB2_MISO: P2.9 U4.4 | length 728.2
  Top Layer w6: v1(980,945) v1(1105,945)
  Bottom Layer w6: v1(980,945) 980,1000.83 U4.4 ; v1(1105,945) 1235,945 1250,960 1250,995 1259.25,1004.25 P2.9
PCB2_MOSI: P2.8 U4.5 | length 724.9
  Top Layer w6: v1(1055,915) v1(1105,915)
  Bottom Layer w6: U4.5 1001.1,918.9 1005,915 v1(1055,915) ; v1(1105,915) 1235,915 1265,945 1265,970 1267.76,972.76 P2.8
PCB2_SCK: P2.10 U4.57 | length 1007
  Top Layer w6: v1(945,785) 1320,785 1325,790 v1(1325,1035)
  Bottom Layer w6: U4.57@845.75,785 v1(945,785) ; v1(1325,1035) 1604.61,1035 P2.10
PD_ALM: P2.11 R8.1 | length 479.2
  Bottom Layer w6: R8.1 1505,1395 1490,1380 1490,1075 1495,1070 1602.6,1070 P2.11
STATUS_RDY: U4.61 U5.6 | length 1555.5
  Top Layer w6: U5.6 317.5,712.5 325,720 v1(370,720)
  Bottom Layer w6: v1(370,720) 370,990 375,995 680,995 685,990 685,870 691.42,863.58 U4.61
TCP_STATUS: U4.47 U5.12 | length 775.8
  Top Layer w6: U5.12 620,87.5 v1(620,305)
  Bottom Layer w6: v1(620,305) 880,305 890,315 890,500 895,505 935,505 942.05,512.05 U4.47
UART_RX: R22.1 U4.43 U5.21 | length 610.8
  Top Layer w6: v1(750,515) 770,515 790,535 U5.21 890,535 895,530 895,500 900,495 v1(1020,495)
  Bottom Layer w6: R22.1 595,505 605,515 v1(750,515) ; v1@1020.79,495.79 U4.43
UART_TX: U4.42 U5.7 | length 1198
  Top Layer w6: U5.7 367.5,52.5 375,45 388.5,58.5 388.5,56.27 393.77,51 811,51 815,55 v1(815,80)
  Bottom Layer w6: v1(815,80) 815,230 820,235 1015,235 1030,250 1030,435 1040.47,445.47 U4.42
VBUS_3V3: C7.1 C8.1 R12.2 R13.1 U4.26 | length 1184.2
  Top Layer w6: v1(1350,845) 1347,848 1347,1452 1365,1470 1485,1470
  Top Layer w10: R12.2 1495,1460 1485,1470 1485,1515 1495,1525 R13.1
  Bottom Layer w6: U4.26 1365.47,745.47 1375,755 1375,850 ; v1(1350,845) 1350,850 1375,850 ; 1375,785 C8.1 ; C7.1 1375,850
VDDOUT: C10.1 C11.1 C12.1 C13.1 U4.9 U4.30 U4.45 | length 1359.5
  Bottom Layer w6: C11.1 950,475 980,505 980,660 988,668 1293.14,668 U4.30 1368.27,666.73 1370,665 1370,595 1375,590 C13.1 ; C10.1 975,1105 981.33,1098.67 1051.78,1098.67 1080,1070.46 U4.9@1080,999.57 ; 1079.84,668 U4.9 ; 1370,655 C12.1
XIN: C20.1 U4.60 XT1.1 | length 433.3
  Bottom Layer w6: C20.1 500,850 506.1,843.9 605,843.9 ; XT1.1 605,843.9 ; U4.60 605,843.9
XIN32: C22.1 U4.11 XT2.1 | length 347.5
  Bottom Layer w6: C22.1 1115,1235 1120,1230 1120,1145 ; XT2.1 1120,1145 ; 1120,1045 1120,1000.2 U4.11 1119.21,1144.21 1120,1145
XOUT: R18.2 U4.59 | length 103.8
  Bottom Layer w6: R18.2 790,795 795,800 795,820 799.21,824.21 U4.59
XOUT32: C23.1 U4.12 XT2.2 | length 321.5
  Bottom Layer w6: U4.12@1140,1000.51 U4.12 1138.9,1145 ; XT2.2 1138.9,1145 ; C23.1 1150,1235 1138.9,1223.9 1138.9,1145
pads on no net: J1.4 J2.7 J2.9 U2.4 U4.3 U4.10 U4.34 U4.35 U4.63 U5.2 U5.9 U5.10 U5.11 U5.13 U5.17 U5.18 U5.22 U5.28 U5.29 U5.30 U5.31 U5.32 U5.33

## Polygon pours and split planes (outlines as drawn)
GND on Bottom Layer "GND-Bottom" (solid, remove dead copper, pour order 0): 0,1575 2060,1575 2060,0 0,0
GND on Top Layer "GND-Top" (solid, remove dead copper, pour order 2): 0,1575 2060,1575 2060,0 0,0

## Keep-outs
Keep-Out Layer:
  lines w5: 10,10 10,1565 2050,1565 2050,10 10,10

## Silkscreen, mask and mechanical layers (free items; w line width, h text height)
Top Overlay:
  text "Ipar" at 1940,85 h25
  text "Oximetro 2016" at 1720,30 h25
Mechanical 1:
  the board outline again, w5
Mechanical 2:
  lines w5: -196.85,0 4316.85,0 ; -196.85,1575 4316.85,1575 ; -196.85,3150 4316.85,3150 ; -196.85,4725 4316.85,4725 ; 0,-255.91 0,4921.85 ; 2060,-255.91 2060,4921.85 ; 4120,-255.91 4120,4921.85 ; -196.85,-255.91 -196.85,4921.85 4316.85,4921.85 4316.85,-255.91 -196.85,-255.91